# Altium PCB PCB2.TEST.PcbDoc
Units mm, origin at the board's own origin, x right, y up, seen from the top; angles counter-clockwise.
Board outline 120.4 x 83.82 mm, 2 copper layers (Top Layer, Bottom Layer); 48 components, 74 nets, 341 pads, 4 vias.
Unrouted connection lines stored in the file: 82.
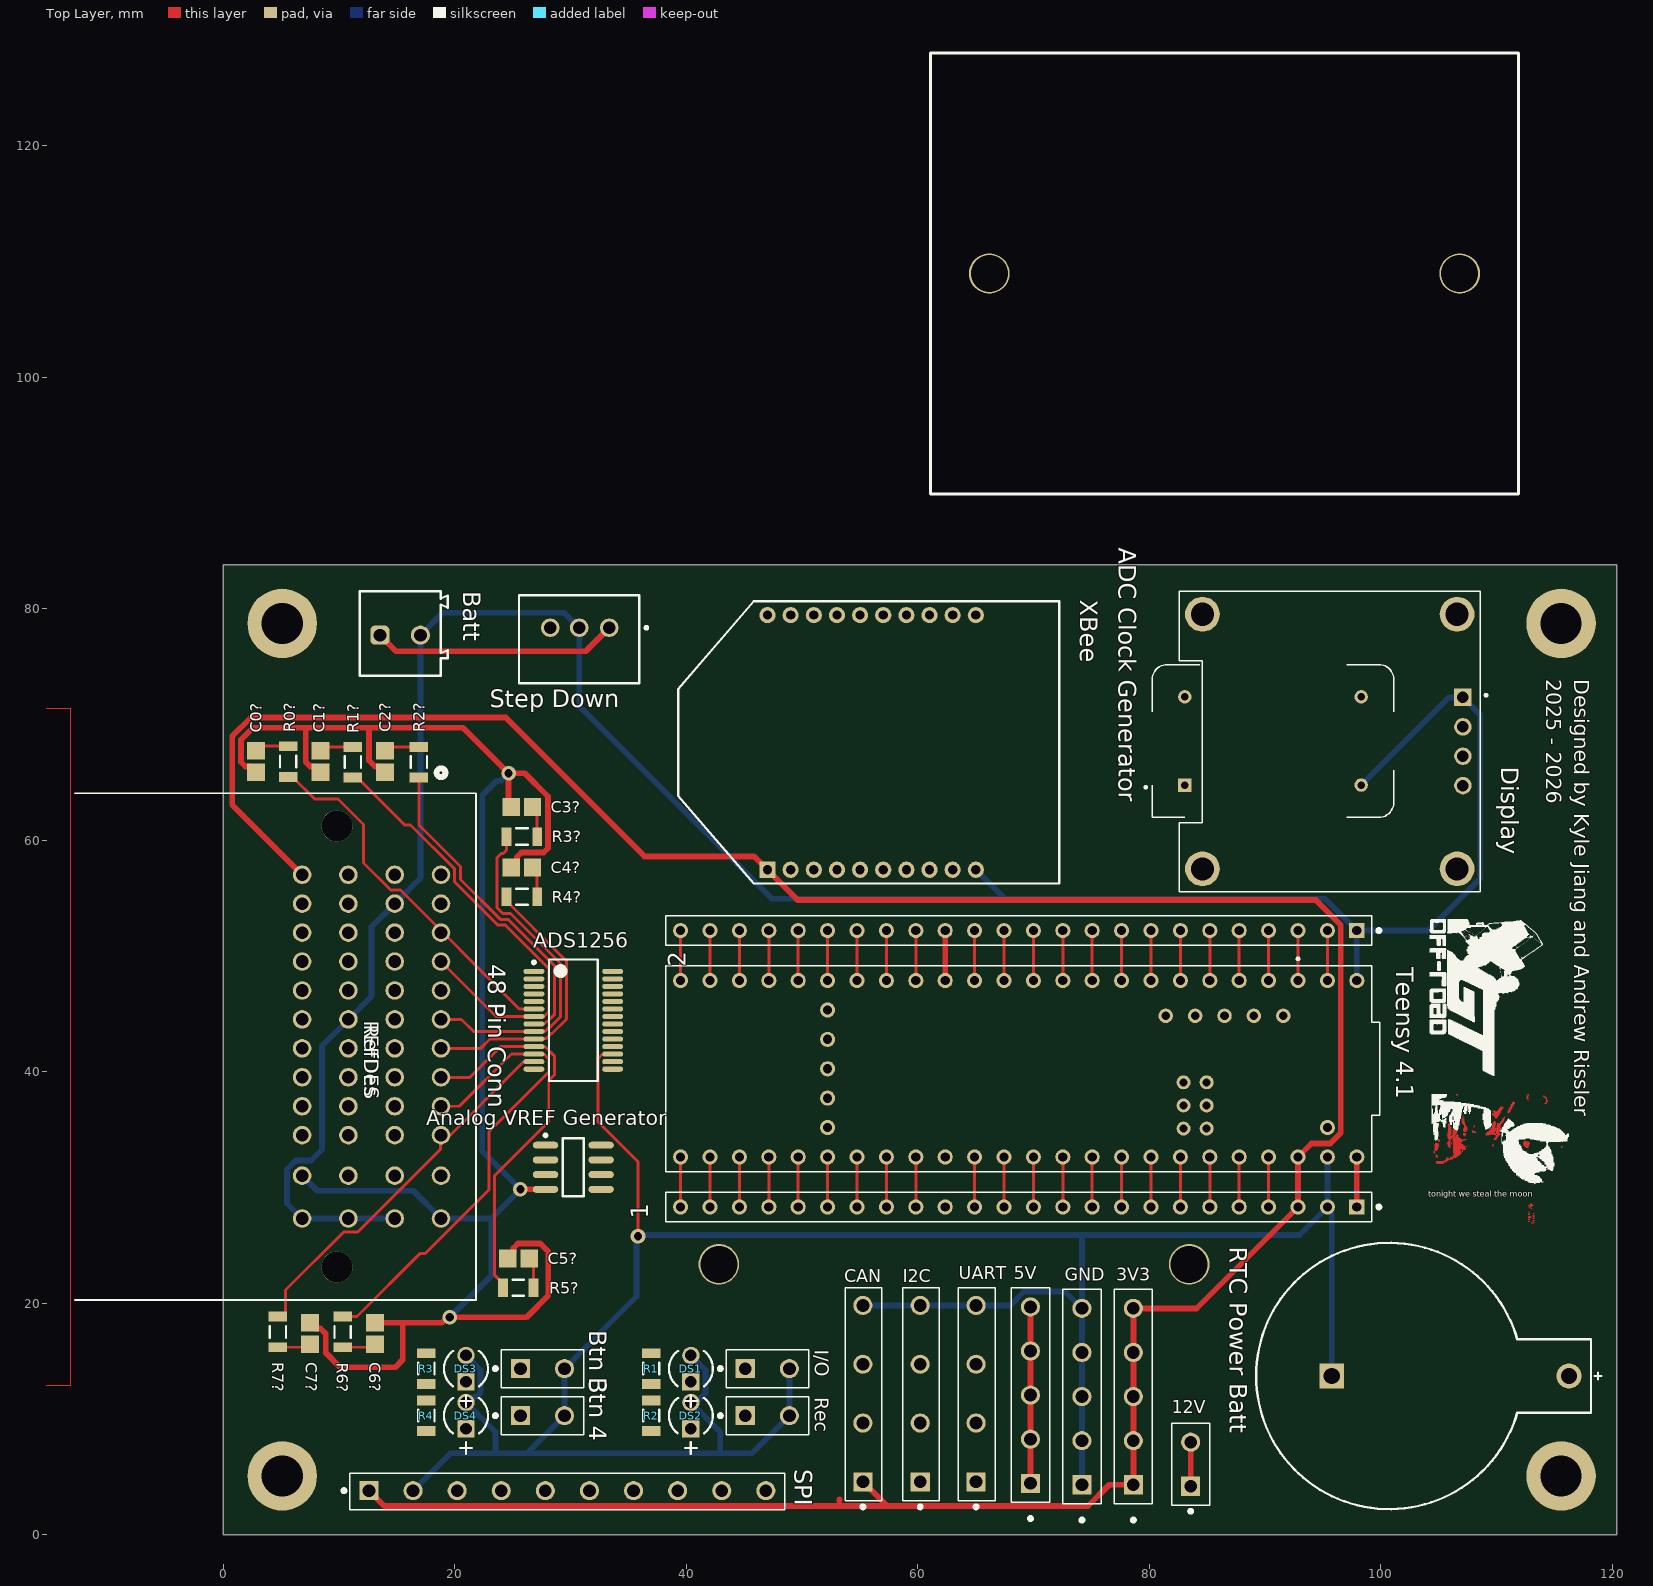
[diagram p0: Top Layer view]
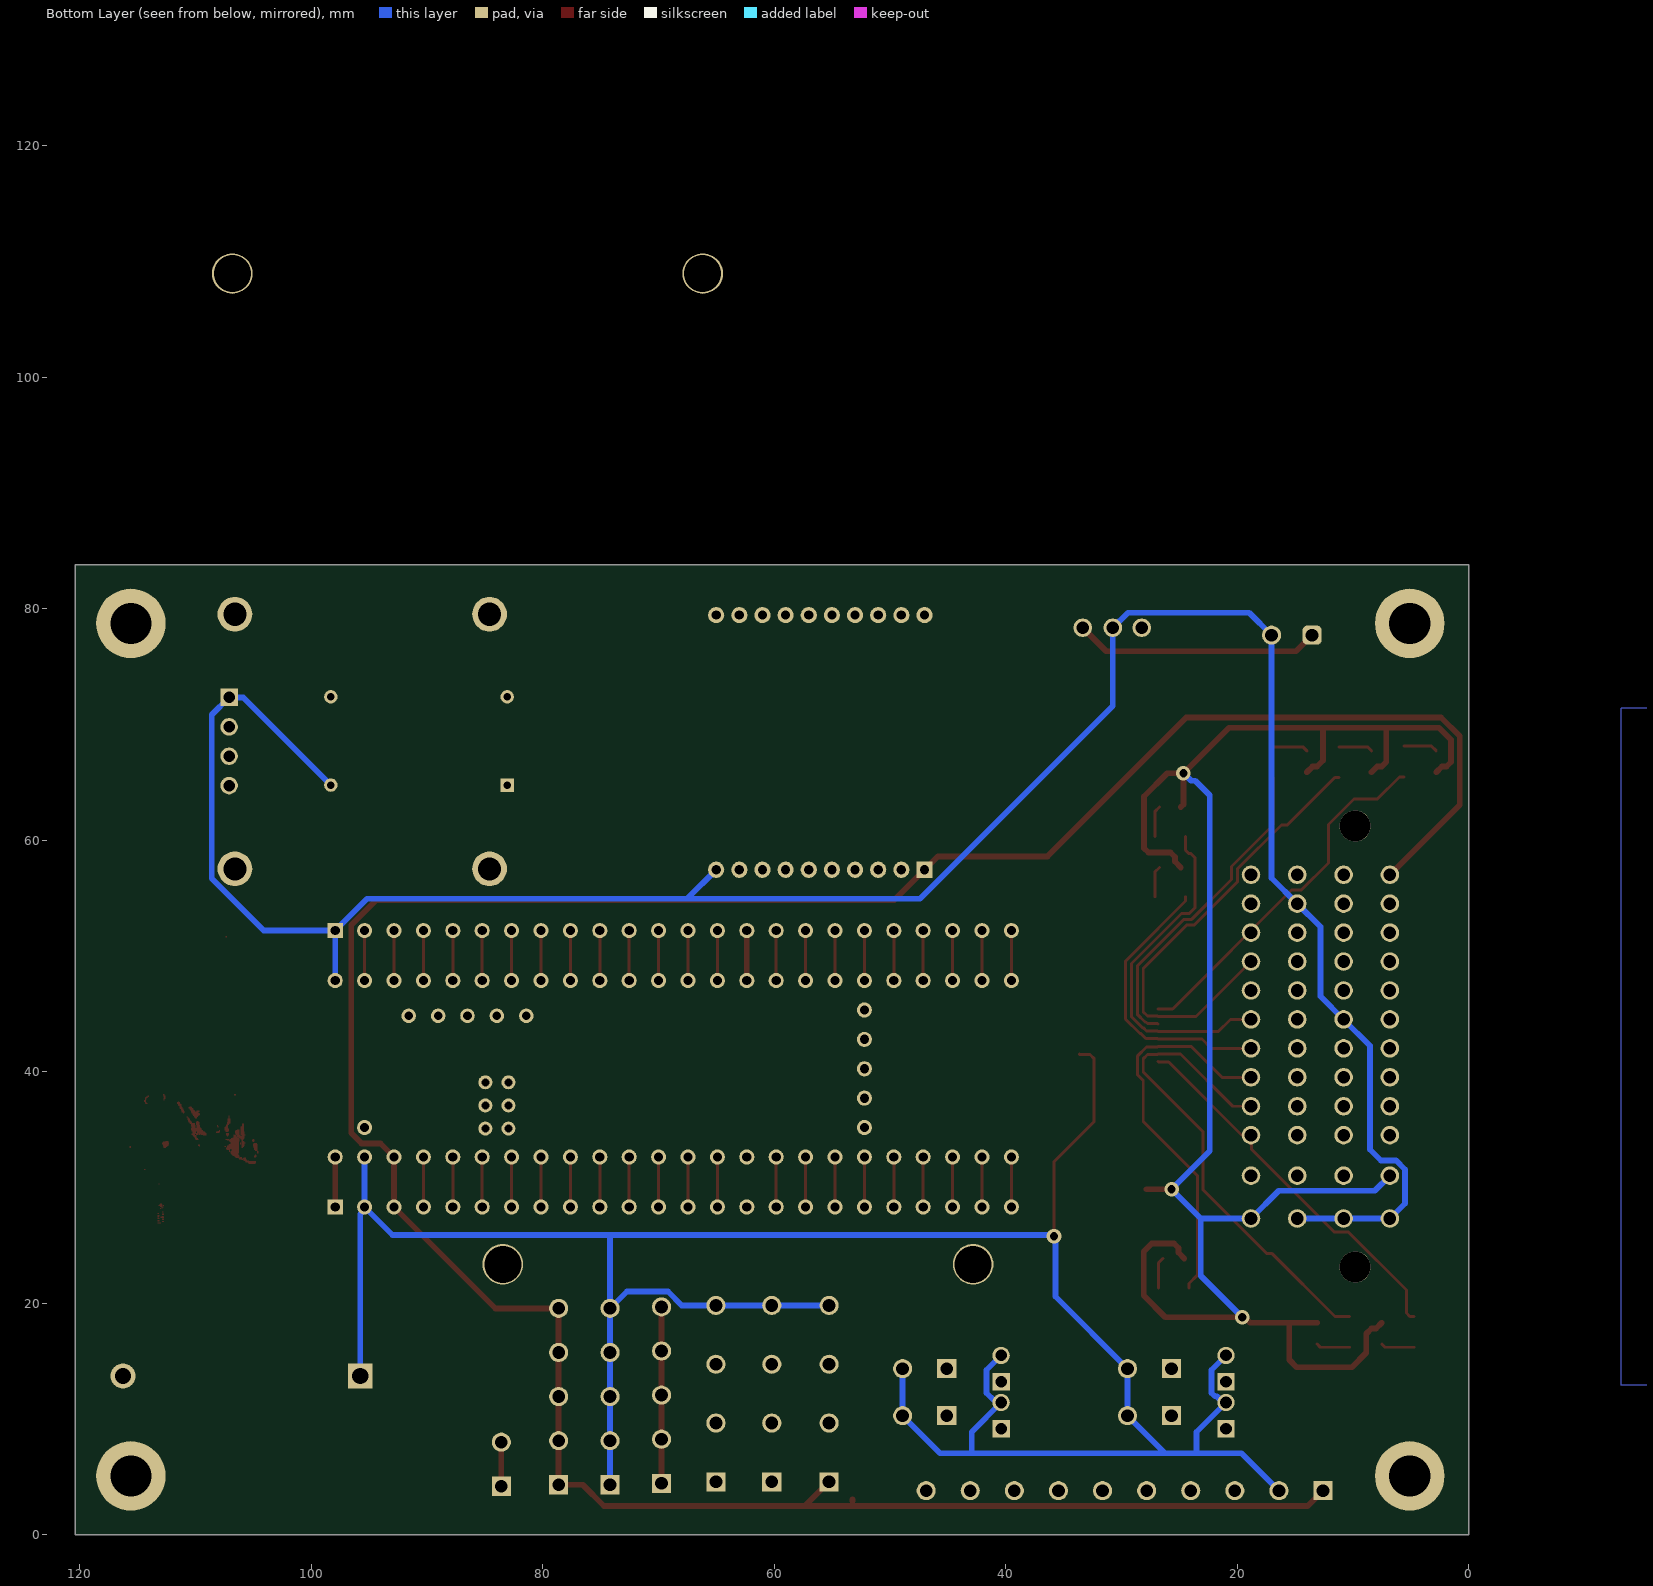
[diagram p1: Bottom Layer view, seen from below]

## Layer stack, top to bottom
Top Solder: solder mask 0.0102, Solder Resist, Dk 3.5
Top Layer: signal copper 0.0356
Dielectric 1: dielectric 0.32, FR-4, Dk 4.8
Bottom Layer: signal copper 0.0356
Bottom Solder: solder mask 0.0102, Solder Resist, Dk 3.5

## Board outline
0,0 0,83.82 120.396,83.82 120.396,0

## Design rules (kind name [scope] priority, off if disabled: settings)
Clearance [All] p1: gap=0.254 ignorepadtopadclearanceinfootprint=FALSE
ComponentClearance Ignore_48pin_Collision [InComponent('48 Pin Conn') And OnLayer('Top Layer')] p1: gap=0 collisioncheckmode=3 verticalgap=0 showdistances=FALSE donotcheckwithout3dbody=TRUE
ComponentClearance Ignore_OLED_Collision [HasFootprint('MODULE_DM-OLED096-636') vs HasFootprint('OSC_ECS-100AX-500')] p2: gap=0 collisioncheckmode=3 verticalgap=0 showdistances=FALSE donotcheckwithout3dbody=TRUE
ComponentClearance [All] p3: gap=0.254 collisioncheckmode=3 verticalgap=0.254 showdistances=FALSE
HoleSize [All] p1: absolutevalues=TRUE maxlimit=3.5 minlimit=0.025 maxpercent=80.000 minpercent=20.000
PolygonConnect [All] p1: connectstyle=Relief reliefconductorwidth=0.254 reliefentries=4 polygonreliefangle="90 Angle" airgapwidth=0.254
RoutingVias [All] p1: holewidth=0.711 width=1.27 viastyle="Through Hole" minholewidth=0.711 minwidth=1.27 maxholewidth=0.711 maxwidth=1.27
SolderMaskExpansion [All] p1: expansion=0.102 istentingtop=FALSE
SupplyNets "Schematic Supply Nets" [InNet('GND')] p1: voltage=0.000
Width [All] p1: maxlimit=0.5 minlimit=0.254 preferedwidth=0.254 minimp=50.000000 maximp=50.000000 favimp=50.000000
28 further rules are at their usual default settings.

## Classes and differential pairs
component class MainSchematic.2: 1 2 "ADC Clock Generator" ADS1256 "Analog VREF Generator" "RTC power batt" "Step Down" "Teensy 4.1" XBee
component class Filters.2: C0? C1? C2? C3? C4? C5? C6? C7? R0? R1? R2? R3? R4? R5? R6? R7?
component class 48PinConnector: 3V3 5V 12V "48 Pin Conn" Batt "Btn 3" "Btn 4" CAN Display DS1 DS2 DS3 DS4 GND I2C I/O R1 R2 R3 R4 Rec SPI UART

## Components (designator, comment, footprint, x,y, rotation, side; value= is the part's Value field where it differs from the comment)
1 "282837-4" TE_282837-4#1 97.917,28.321 r180 top
2 "282837-4" TE_282837-4#1 97.917,52.197 r180 top
3V3 "282837-4" TE_282837-4#2 78.613,4.318 r90 top
5V "282837-4" TE_282837-4#2 69.723,4.445 r90 top
12V "282837-4" TE_282837-4#3 83.566,4.191 r90 top
"48 Pin Conn" "366380003" CONN_36638-0003_MOL 18.796,57.023 r270 top (schematic designator J?)
"ADC Clock Generator" "MCO-1510A" OSC_ECS-100AX-500 90.678,68.58 r0 top
ADS1256 "ADS1256IDBTG4" TI-DB28_L 30.226,44.45 r0 top
"Analog VREF Generator" "ADR4550ARZ" ADI-R-8_N 30.226,31.75 r0 top
Batt "691214110002S" 691214110002S 15.268,77.874 r0 top
"Btn 3" "282837-4" TE_282837-4#3 25.654,14.351 r0 top
"Btn 4" "282837-4" TE_282837-4#3 25.654,10.287 r0 top
C0? "VJ0805Y682KXAMT" CAPC2013X145X48ML20T23 2.794,66.802 r90 top
C1? "VJ0805Y682KXAMT" CAPC2013X145X48ML20T23 8.382,66.802 r90 top
C2? "VJ0805Y682KXAMT" CAPC2013X145X48ML20T23 13.97,66.802 r90 top
C3? "VJ0805Y682KXAMT" CAPC2013X145X48ML20T23 25.781,62.865 r0 top
C4? "VJ0805Y682KXAMT" CAPC2013X145X48ML20T23 25.781,57.658 r0 top
C5? "VJ0805Y682KXAMT" CAPC2013X145X48ML20T23 25.491,23.876 r0 top
C6? "VJ0805Y682KXAMT" CAPC2013X145X48ML20T23 13.081,17.399 r270 top
C7? "VJ0805Y682KXAMT" CAPC2013X145X48ML20T23 7.493,17.399 r270 top
CAN "282837-4" TE_282837-4#4 55.245,4.572 r90 top
Display "DM-OLED096-636" MODULE_DM-OLED096-636 95.582,68.531 r270 top
DS1 "304090041" LED-2P-2.28-3MM_A 40.386,14.351 r90 top
DS2 "304090041" LED-2P-2.28-3MM_A 40.386,10.287 r90 top
DS3 "304090041" LED-2P-2.28-3MM_A 20.955,14.351 r90 top
DS4 "304090041" LED-2P-2.28-3MM_A 20.955,10.287 r90 top
GND "282837-4" TE_282837-4#2 74.168,4.318 r90 top
I2C "282837-4" TE_282837-4#4 60.198,4.572 r90 top
I/O "282837-4" TE_282837-4#3 45.085,14.351 r0 top
R0? "RC1206FR-10750RL" RESC3116X65X40LL10T20 5.588,66.802 r90 top
R1 "RC1206FR-10750RL" RESC3116X65X40LL10T20 36.957,14.351 r270 top
R1? "RC1206FR-10750RL" RESC3116X65X40LL10T20 11.176,66.747 r90 top
R2 "RC1206FR-10750RL" RESC3116X65X40LL10T20 36.957,10.287 r270 top
R2? "RC1206FR-10750RL" RESC3116X65X40LL10T20 16.891,66.747 r90 top
R3 "RC1206FR-10750RL" RESC3116X65X40LL10T20 17.526,14.351 r270 top
R3? "RC1206FR-10750RL" RESC3116X65X40LL10T20 25.781,60.325 r0 top
R4 "RC1206FR-10750RL" RESC3116X65X40LL10T20 17.526,10.287 r270 top
R4? "RC1206FR-10750RL" RESC3116X65X40LL10T20 25.781,55.118 r0 top
R5? "RC1206FR-10750RL" RESC3116X65X40LL10T20 25.472,21.336 r0 top
R6? "RC1206FR-10750RL" RESC3116X65X40LL10T20 10.287,17.526 r270 top
R7? "RC1206FR-10750RL" RESC3116X65X40LL10T20 4.699,17.526 r270 top
Rec "282837-4" TE_282837-4#3 45.085,10.287 r0 top
"RTC Power Batt" "101" FP-101-MFG 103.683,13.716 r0 top (schematic designator "RTC power batt")
SPI "282837-4" TE_282837-4#5 12.573,3.81 r0 top (schematic designator J?)
"Step Down" "OKI-78SR-5/1.5-W36-C" MURA-OKI-78SR-3 30.734,78.359 r180 top (schematic designator "Step Down Circuit")
"Teensy 4.1" "DEV-16771" MODULE_DEV-16771 68.707,40.259 r180 top
UART "282837-4" TE_282837-4#4 65.024,4.572 r90 top
XBee "XBP9B-DPST-001" DIP2200W51P200L3294H279Q20P 55.753,68.453 r90 top

## Footprints (in the part's own frame and the unit in brackets; to place one, negate y for a bottom-side part, rotate by r counter-clockwise, add the part's x,y. Pads: shape width x height; smd on the part's side, far side on the other; paste and mask are expansions set on the pad)
691214110002S [mm]
  rrect50% 1.65x1.65 hole 1.1: 1(-1.75,-0.15)
  round 1.65 hole 1.1: 2(1.75,-0.15)
  silkscreen extent -3.5,-3.65 4.1,3.65, body extent -3.5,-3.65 4.1,3.65, height 9.15
ADI-R-8_N [mm] "SOIC, 8-Leads, Body 4.9x3.9mm, Pitch 1.27mm, IPC Medium Density"
  oval 2.2x0.6 smd: 1(-2.4,1.905) 2(-2.4,0.635) 3(-2.4,-0.635) 4(-2.4,-1.905) 5(2.4,-1.905) 6(2.4,-0.635) 7(2.4,0.635) 8(2.4,1.905)
  silkscreen extent -2.52,-2.5 0.9,2.88, body extent -2,-2.5 2,2.5, height 1.75
CAPC2013X145X48ML20T23 [mm] "Chip Capacitor, 2-Leads, Body 2.00x1.25mm, IPC Low Density"
  rect 1.5x1.55 smd: 1(-0.925,0) 2(0.925,0)
  body extent -1.1,-0.72 1.1,0.72, height 1.45
CONN_36638-0003_MOL [mil]
  round 63 / inner round 60 / far side round 63 hole 43 paste-99999 mask+0: A1(0,0) A2(0,-157.48) A3(0,-314.96) A4(0,-472.44) B1(98.43,0) B2(98.43,-157.48) B3(98.43,-314.96) B4(98.43,-472.44) C1(196.85,0) C2(196.85,-157.48) C3(196.85,-314.96) C4(196.85,-472.44) D1(295.28,0) D2(295.28,-157.48) D3(295.28,-314.96) D4(295.28,-472.44) E1(393.7,0) E2(393.7,-157.48) E3(393.7,-314.96) E4(393.7,-472.44) F1(492.13,0) F2(492.13,-157.48) F3(492.13,-314.96) F4(492.13,-472.44) G1(590.55,0) G2(590.55,-157.48) G3(590.55,-314.96) G4(590.55,-472.44) H1(688.98,0) H2(688.98,-157.48) H3(688.98,-314.96) H4(688.98,-472.44) J1(787.4,0) J2(787.4,-157.48) J3(787.4,-314.96) J4(787.4,-472.44) K1(885.83,0) K2(885.83,-157.48) K3(885.83,-314.96) K4(885.83,-472.44) L1(1023.62,0) L2(1023.62,-157.48) L3(1023.62,-314.96) L4(1023.62,-472.44) M1(1169.29,0) M2(1169.29,-157.48) M3(1169.29,-314.96) M4(1169.29,-472.44)
  round 106 / inner round 60 / far side round 106 hole 106 unplated paste-99999 mask+0: MOUNT1(-165.35,-354.33) MOUNT2(1334.65,-354.33)
  Multi-Layer lines w1: 1441.15,-2098.83 1441.15,-1377.9 1736.15,-1377.9 1736.15,-1259.9 -566.85,-1259.9 -566.85,-1377.9 -271.85,-1377.9 -271.85,-2098.83 1441.15,-2098.83
  silkscreen extent -362,-1245 1446,119
DIP2200W51P200L3294H279Q20P [mm]
  rect 1.4x1.4 / inner round 1.4 / far side rect 1.4x1.4 hole 0.8 mask+0.102: 1(-11,8.75)
  round 1.4 hole 0.8 mask+0.102: 2(-11,6.75) 3(-11,4.75) 4(-11,2.75) 5(-11,0.75) 6(-11,-1.25) 7(-11,-3.25) 8(-11,-5.25) 9(-11,-7.25) 10(-11,-9.25) 11(11,-9.25) 12(11,-7.25) 13(11,-5.25) 14(11,-3.25) 15(11,-1.25) 16(11,0.75) 17(11,2.75) 18(11,4.75) 19(11,6.75) 20(11,8.75)
  silkscreen extent -12.19,-16.47 12.19,16.47, body extent -12.19,-16.47 12.19,29.17, height 7.67
FP-101-MFG [mm]
  rect 2.145x2.145 hole 1.395 paste-2539.97 mask+0: 1(-7.925,0)
  round 2.145 hole 1.395 paste-2539.97 mask+0: 2(12.565,0)
  silkscreen extent -14.46,-11.5 15.37,11.5, body extent -14.57,-11.61 14.57,11.61, height 0.25
LED-2P-2.28-3MM_A [mm] "LED, 2-Leads, Dia 3mm, Pitch 2.28mm"
  rect 1.5x1.5 hole 1: 1(-1.14,0)
  round 1.5 hole 1: 2(1.14,0)
  silkscreen extent -3.29,-1.9 1.52,1.9, body extent -1.9,-1.91 1.52,1.91, height 5.3
MODULE_DEV-16771 [mm]
  round 1.308 hole 0.8: 0(-26.67,-7.62) 1(-24.13,-7.62) 2(-21.59,-7.62) 3(-19.05,-7.62) 3.3V_1(6.35,-7.62) 3.3V_2(-24.13,7.62) 3.3V_3(16.51,-2.54) 4(-16.51,-7.62) 5(-13.97,-7.62) 6(-11.43,-7.62) 7(-8.89,-7.62) 8(-6.35,-7.62) 9(-3.81,-7.62) 10(-1.27,-7.62) 11(1.27,-7.62) 12(3.81,-7.62) 13(3.81,7.62) 14(1.27,7.62) 15(-1.27,7.62) 16(-3.81,7.62) 17(-6.35,7.62) 18(-8.89,7.62) 19(-11.43,7.62) 20(-13.97,7.62) 21(-16.51,7.62) 22(-19.05,7.62) 23(-21.59,7.62) 24(8.89,-7.62) 25(11.43,-7.62) 26(13.97,-7.62) 27(16.51,-7.62) 28(19.05,-7.62) 29(21.59,-7.62) 30(24.13,-7.62) 31(26.67,-7.62) 32(29.21,-7.62) 33(29.21,7.62) 34(26.67,7.62) 35(24.13,7.62) 36(21.59,7.62) 37(19.05,7.62) 38(16.51,7.62) 39(13.97,7.62) 40(11.43,7.62) 41(8.89,7.62) GND1(-29.21,-7.62) GND2(6.35,7.62) GND3(-26.67,7.62) GND4(16.51,0) ON/OFF(16.51,5.08) PROGRAM(16.51,2.54) VBAT(16.51,-5.08) VIN(-29.21,7.62) VUSB(-26.67,5.08)
  round 1.258 hole 0.75: 5V(-22.86,-4.57) D+(-17.78,-4.57) D-(-20.32,-4.57) USB_GND1(-15.24,-4.57) USB_GND2(-12.7,-4.57)
  round 1.208 hole 0.7: GND5(-14.24,3.17) LED(-16.24,3.17) R+(-16.24,5.17) R-(-14.24,5.17) T+(-14.24,1.17) T-(-16.24,1.17)
  silkscreen extent -31.18,-9.6 30.48,8.89, body extent -31.18,-8.89 30.48,8.89, height 7.15
MODULE_DM-OLED096-636 [mm]
  rect 1.508x1.508 / inner round 1.508 / far side rect 1.508x1.508 hole 1: 1(-3.81,11.5)
  round 1.508 hole 1: 2(-1.27,11.5) 3(1.27,11.5) 4(3.81,11.5)
  round 3 hole 2: S1(-11,11) S2(11,11) S3(11,-11) S4(-11,-11)
  silkscreen extent -13,-13 13,13.6
MURA-OKI-78SR-3 [mm] "THMT, 3-Leads, Body 10.4x7.6mm"
  round 1.6 hole 1.1: 1(-2.6,0) 2(0,0) 3(2.5,0)
  silkscreen extent -5.92,-2.8 5.2,4.8, body extent -5.2,-2.8 5.2,4.8, height 16.5
OSC_ECS-100AX-500 [mm]
  rect 1.158x1.158 hole 0.65: 1(-7.62,-3.81)
  round 1.158 hole 0.65: 7(7.62,-3.81) 8(7.62,3.81) 14(-7.62,3.81)
  silkscreen extent -11.1,-6.6 10.43,6.6
RESC3116X65X40LL10T20 [mm] "Chip Resistor, 2-Leads, Body 3.10x1.60mm, IPC High Density"
  rect 0.85x1.6 smd: 1(-1.325,0) 2(1.325,0)
  silkscreen extent -0.5,-0.7 0.5,0.7, body extent -1.6,-0.85 1.6,0.85, height 0.65
TE_282837-4#1 [mm]
  rect 1.308x1.308 / inner round 1.308 / far side rect 1.308x1.308 hole 0.8: 1(0,0)
  round 1.308 hole 0.8: 2(2.54,0) 3(5.08,0) 4(7.62,0) 5(10.16,0) 6(12.7,0) 7(15.24,0) 8(17.78,0) 9(20.32,0) 10(22.86,0) 11(25.4,0) 12(27.94,0) 13(30.48,0) 14(33.02,0) 15(35.56,0) 16(38.1,0) 17(40.64,0) 18(43.18,0) 19(45.72,0) 20(48.26,0) 21(50.8,0) 22(53.34,0) 23(55.88,0) 24(58.42,0)
  silkscreen extent -2.05,-1.27 59.69,1.27
TE_282837-4#2 [mm]
  rect 1.65x1.65 / inner round 1.65 / far side rect 1.65x1.65 hole 1.1: 1(0,0)
  round 1.65 hole 1.1: 2(3.81,0) 3(7.62,0) 4(11.43,0) 5(15.24,0)
  silkscreen extent -3.2,-1.65 16.89,1.65
TE_282837-4#3 [mm]
  rect 1.65x1.65 / inner round 1.65 / far side rect 1.65x1.65 hole 1.1: 1(0,0)
  round 1.65 hole 1.1: 2(3.81,0)
  silkscreen extent -2.31,-1.65 5.46,1.65
TE_282837-4#4 [mm]
  rect 1.65x1.65 / inner round 1.65 / far side rect 1.65x1.65 hole 1.1: 1(0,0)
  round 1.65 hole 1.1: 2(5.08,0) 3(10.16,0) 4(15.24,0)
  silkscreen extent -2.31,-1.65 16.76,1.52, body extent -1.65,-1.65 16.76,1.52, height 0.25
TE_282837-4#5 [mm]
  rect 1.65x1.65 / inner round 1.65 / far side rect 1.65x1.65 hole 1.1: 1(0,0)
  round 1.65 hole 1.1: 2(3.81,0) 3(7.62,0) 4(11.43,0) 5(15.24,0) 6(19.05,0) 7(22.86,0) 8(26.67,0) 9(30.48,0) 10(34.29,0)
  silkscreen extent -2.31,-1.65 35.94,1.52
TI-DB28_L [mm] "SOP, 28-Leads, Body 10.2x5.3mm, Pitch 0.65mm, IPC High Density"
  oval 1.8x0.45 smd: 1(-3.4,4.225) 2(-3.4,3.575) 3(-3.4,2.925) 4(-3.4,2.275) 5(-3.4,1.625) 6(-3.4,0.975) 7(-3.4,0.325) 8(-3.4,-0.325) 9(-3.4,-0.975) 10(-3.4,-1.625) 11(-3.4,-2.275) 12(-3.4,-2.925) 13(-3.4,-3.575) 14(-3.4,-4.225) 15(3.4,-4.225) 16(3.4,-3.575) 17(3.4,-2.925) 18(3.4,-2.275) 19(3.4,-1.625) 20(3.4,-0.975) 21(3.4,-0.325) 22(3.4,0.325) 23(3.4,0.975) 24(3.4,1.625) 25(3.4,2.275) 26(3.4,2.925) 27(3.4,3.575) 28(3.4,4.225)
  silkscreen extent -3.52,-5.25 2.1,5.25, body extent -2.8,-5.25 2.8,5.25, height 2

## Part data
1 2 3V3 5V 12V "Btn 3" "Btn 4" CAN GND I2C I/O Rec SPI UART: "4 Position Wire to Board Terminal Block Horizontal with Board 0.200 (5.08mm) Through Hole", Package=None, Availability="In Stock", Check_prices=https://www.snapeda.com/parts/282837-4/TE+Connectivity+AMP+Connectors/view-part/?ref=eda, EU_RoHS_Compliance="Compliant with Exemptions", MF="TE Connectivity", MP=282837-4, Price=None, Purchase-URL=https://pricing.snapeda.com/search/part/282837-4/?ref=eda, SnapEDA_Link=https://www.snapeda.com/parts/282837-4/TE+Connectivity+AMP+Connectors/view-part/?ref=snap
"48 Pin Conn": "2.50mm, 3.50mm CMC Header, Right-Angle, 48 Position, 1 Port, Brown, Peg,  Lead-Free", Manufacturer_Name="Molex Connector Corporation", Copyright="Copyright (C) 2025 Ultra Librarian. All rights reserved.", Manufacturer_Part_Number=366380003, RefDes=RefDes, Type=Type
"ADC Clock Generator": library part ECS-100AX-500, "Oscillator  14-DIP, 4 Leads (Full Size, Metal Can)", Package=None, Availability=Unavailable, MP=ECS-100AX-500, Price=None
ADS1256: library part CMP-0003-00153-1, "24-Bit, 30 kSPS Very Low Noise Delta-Sigma ADC with Multiplexer, -40 to 85 degC, 28-pin SOP (DB28), Green (RoHS & no Sb/Br)", Analog Voltage AV/DD(Max)(V)=5.25, Analog Voltage AV/DD(Min)(V)=4.75, Manufacturer="Texas Instruments", # Input Channels=8, Architecture=Delta-Sigma, Code_JEDEC=MO-150, ComponentLink1Description="Manufacturer URL", ComponentLink1URL=http://www.ti.com/, ComponentLink2Description=Datasheet, ComponentLink2URL=http://www.ti.com/general/docs/lit/getliterature.tsp?genericPartNumber=ADS1256&fileType=pdf, ComponentLink3Description="Package Specification", ComponentLink3URL=http://www.ti.com/lit/ml/msso002e/msso002e.pdf, DatasheetVersion=SBAS288J, Digital Supply(Max)(V)=3.6, Digital Supply(Min)(V)=1.8, Eco-Plan="Green (RoHS & no Sb/Br)", Interface="Serial SPI", Mounting Technology="Surface Mount", PackageDescription="28-Pin Plastic Small Outline, Body 10.2 X 5.3 mm, Pitch 0.65 mm", PackageReference=DB28, PackageVersion="4040065/E, 12/2001", PartNumber=ADS1256IDBTG4, Resolution(Bits)=24, Sample Rate (max)(SPS)=30k, SubFamily="Precision ADC (<=10MSPS)"
"Analog VREF Generator": library part CMP-0784-00194-1, "Ultralow Noise, High Accuracy Voltage Reference, 5 V Output, 3 to 15 V Supply, Industrial, 8-pin SOIC (R-8), Tube", Manufacturer="Analog Devices", Operating Temp Range="-40 to 125 degC", Code_JEDEC=MS-012-AA, ComponentLink1Description="Manufacturer URL", ComponentLink1URL=http://www.analog.com/en/index.html, ComponentLink2Description=Datasheet, ComponentLink2URL=http://www.analog.com/static/imported-files/data_sheets/ADR4520_4525_4530_4533_4540_4550.pdf, ComponentLink3Description="Package Specification", ComponentLink3URL=http://www.analog.com/static/imported-files/packages/PKG_PDF/SOIC_Narrow%20(R)/R_8.pdf, ComponentLink4Description="URL Link1", ComponentLink4URL="Product URL:http://www.analog.com/en/special-linear-functions/voltage-references/adr4550/products/product.html", DatasheetVersion="Rev. 0", Max V Supply (V)=15, Min V Supply (V)=3, Mounting Technology="Surface Mount", PackageDescription="8-Pin Standard Small Outline Package, Body 4.9 x 3.9 mm, Pitch 1.27 mm", PackageReference=R-8, PackageVersion="060506-A, 06/2006", Packing=Tube, PartNumber=ADR4550ARZ, Ref Out TC (ppm/C)=4, Vout=5V
Batt: library part CMP-1502-02465-2, Current Rating=10A, Max Operating Temperature=120°C, Min Operating Temperature=-30°C, Voltage Rating=300V, Contact Material="Nickel, Tin", Height=9.2mm, Lead Pitch=3.5mm, NexarPartId=94172715, Number of Contacts=2, Number of Pins=2, Number of Rows=1, Packaging=Box
C0? C1? C2? C3? C4? C5? C6? C7?: library part CMP-2007-03205-1, Manufacturer=Vitramon, Part Number=VJ0805Y682KXAMT
Display: "0.96â€ 128 X 64 MONOCHROME GRAPHIC OLED DISPLAY MODULE - I2C", Package=Package, Check_prices=https://www.snapeda.com/parts/DM-OLED096-636/Display+Module/view-part/?ref=eda, MF="Display Module", MP=DM-OLED096-636, SnapEDA_Link=https://www.snapeda.com/parts/DM-OLED096-636/Display+Module/view-part/?ref=snap
DS1 DS2 DS3 DS4: library part CMP-007-00007-2, "Red LED, 80 mW, 30 mA, -25 to 85 degC, 2-Pin THD", Manufacturer="Shenzhen CGX", Package Description="2-Pin Through Hole Device, Dia 3 mm, Pitch 2.28 mm", Case/Package=304090041, Datasheet URL=http://datasheet.octopart.com/304090041-Chengguangxing-datasheet-62330656.pdf, Datasheet Version=Sep-14, Manufacturer URL=http://szcgx.com/, Mounting Technology=TH, Package Reference=304090041, RoHS Compliant=Unknown
R0? R1 R1? R2 R2? R3 R3? R4 R4? R5? R6? R7?: library part CMP-2003-04964-1, Manufacturer=Yageo, Part Number=RC1206FR-10750RL
"RTC Power Batt": library part CMP-19636-000018-1, "BATTERY HOLDER COIN 20MM PC PIN", Max Operating Temperature=145°C, Min Operating Temperature=-50°C, Package Quantity=1, Body Material=PBT, Contact Plating=Tin, Lead Free="Lead Free", Material=Steel, Mount="Through Hole", Number of Batteries=1, Number of Cells=1, Packaging=Bag, REACH SVHC="No SVHC", series=-, Termination="PC Pin"
"Step Down": library part CMP-2000-05274-1, "Non-Isolated DC/DC Converter, 7.5 W, 7 to 36 V, 1.5 A, -40 to 85 degC, 3-Pin THD, RoHS", Current - Output (Max)=1.5A, Manufacturer=Murata, Operating Temperature=-40degC~85degC, Package / Case=3-SIPModule, Power (Watts) - Manufacture Series=8W, Voltage - Input (Max)=36V, Voltage - Input (Min)=7V, Voltage - Isolation=-, Voltage - Output 1=5V, Applications=ITE(Commercial), Category=PowerSupplies-BoardMount, Datasheet URL=https://datasheet.ciiva.com/8006/1790439-8006672.pdf, Datasheet Version=Oct-13, Efficiency=90.5%, Family=DCDCConverters, Features=SCP, Manufacturer URL=http://www.murata.com/, Mounting Type=ThroughHole, Number of Outputs=1, Packaging=Tube, Power (Watts) - Max=8W, series=Okami™OKI-78SR, Size / Dimension="0.41\"Lx0.30\"Wx0.65\"H(10.4mmx7.6mmx16.5mm)", Type=LinearRegulatorReplacement, Voltage - Output 2=-, Voltage - Output 3=-
"Teensy 4.1": library part CMP-003-000000-1, "RT1062 Teensy 4.1 series ARM?Cortex?M7 MPU Embedded Evaluation Board", Package=None, Check_prices=https://www.snapeda.com/parts/DEV-16771/SparkFun+Electronics/view-part/?ref=eda, MF="SparkFun Electronics", MP=DEV-16771, SnapEDA_Link=https://www.snapeda.com/parts/DEV-16771/SparkFun+Electronics/view-part/?ref=snap
XBee: "General ISM < 1GHz - Transceiver Module 900MHz Antenna Not Included, RP-SMA Through Hole", Package="Module Digi International", Check_prices=https://www.snapeda.com/parts/XBP9B-DPST-001/Digi+International/view-part/?ref=eda, MF="Digi International", MP=XBP9B-DPST-001, SnapEDA_Link=https://www.snapeda.com/parts/XBP9B-DPST-001/Digi+International/view-part/?ref=snap

## Free pads (board coordinates)
  round 6 hole 3.55: 6(5.08,78.74) 7(5.08,5.08) 8(115.57,78.74) 9(115.57,5.08)
  round 3.5 hole 3.2: 10(66.167,108.966) 11(106.807,108.966) 13(42.799,23.368) 14(83.439,23.368)

## Via types
v1: diameter 1.27, hole 0.711, Top Layer to Bottom Layer, 4 vias

## Nets (pads, with @x,y where several pads share a name; then routed paths per layer and width w, separated by ;. In a path a pad name is that pad's centre, name@x,y a point inside that pad or via, vN(x,y) a via of type N, cw(c..) or ccw(c..) an arc to the next point about the centre after c; other vN are vias at no path point)
GND: 1.2 1.15 2.1 "48 Pin Conn.B2" "48 Pin Conn.F3" "48 Pin Conn.M2" "48 Pin Conn.M3" "48 Pin Conn.M4" "ADC Clock Generator.7" "Btn 3.2" "Btn 4.2" "RTC Power Batt.1" "Step Down.2" "Teensy 4.1.GND1" "Teensy 4.1.GND2" "Teensy 4.1.GND3" ADS1256.3 ADS1256.17 Batt.2 CAN.4 Display.1 DS1.2 DS2.2 DS3.2 DS4.2 GND.1 GND.2 GND.3 GND.4 GND.5 I2C.4 I/O.2 Rec.2 SPI.2 UART.4 XBee.10 | length 433.2
  Top Layer w0.254: ADS1256.17 33.588,41.487 32.706,41.487 32.345,41.126 32.345,35.699 35.814,32.23 v1(35.814,25.781)
  Bottom Layer w0.5: 14.796,27.323 10.796,27.323 6.796,27.323 5.492,28.627 5.492,31.563 6.256,32.327 7.562,32.327 8.515,33.28 8.515,42.242 10.796,44.523 12.796,46.523 12.796,52.523 14.796,54.523 17.018,56.745 Batt.2 18.957,79.663 29.43,79.663 30.734,78.359 30.734,71.609 47.402,54.941 67.515,54.941 ; SPI.2 19.622,7.049 23.495,7.049 ; DS3.2 22.209,14.237 22.209,12.252 21.914,11.957 21.756,11.957 21.226,11.427 DS4.2 23.495,8.887 23.495,7.049 ; v1@35.687,25.908 74.168,25.908 ; v1(35.814,25.781) 35.687,25.654 35.687,20.574 29.464,14.351 29.464,10.287 26.226,7.049 ; DS1.2 41.64,14.237 41.64,12.252 41.006,11.618 40.577,11.618 DS2.2 42.926,8.887 42.926,7.049 ; I/O.2 Rec.2 45.657,7.049 42.926,7.049 ; CAN.4 I2C.4 UART.4 67.971,19.812 69.173,21.014 72.712,21.014 GND.5 ; XBee.10 67.515,54.941 ; GND.1 GND.2 GND.3 GND.4 GND.5 ; 95.377,32.639 1.2 ; 95.758,13.716 95.758,27.721 95.377,28.102 1.2 ; 97.917,47.879 2.1 ; 98.298,64.77 105.869,72.341 Display.1 108.586,70.837 108.586,56.701 104.082,52.197 2.1 ; 23.495,7.049 26.226,7.049 ; 26.226,7.049 42.926,7.049 ; 67.515,54.941 95.173,54.941 2.1 ; GND.5 74.168,25.908 ; 74.168,25.908 92.964,25.908 1.2
Net1_1: 1.1 5V.1 5V.2 5V.3 5V.4 5V.5 "48 Pin Conn.A2" "48 Pin Conn.E3" "48 Pin Conn.L2" "Step Down.3" "Teensy 4.1.VIN" ADS1256.1 Display.2 I2C.1 SPI.3 UART.1 | length 19.6
  Top Layer w0.5: 5V.1 5V.5 ; 1.1 97.917,32.639
Net1_3: 1.3 2.15 3V3.1 3V3.2 3V3.3 3V3.4 3V3.5 "48 Pin Conn.A4" "ADC Clock Generator.14" "Teensy 4.1.3.3V_1" "Teensy 4.1.3.3V_2" ADS1256.16 CAN.1 SPI.1 XBee.1 | length 253
  Top Layer w0.5: 6.796,57.023 0.761,63.058 0.761,68.998 2.375,70.612 24.383,70.612 36.385,58.61 45.846,58.61 XBee.1 49.616,54.84 94.372,54.84 96.535,52.677 96.535,34.699 95.633,33.797 93.995,33.797 92.837,32.639 1.3 84.074,19.558 3V3.5 3V3.4 3V3.3 3V3.2 3V3.1 76.531,4.318 74.694,2.481 57.277,2.481 ; SPI.1 13.902,2.481 57.277,2.481 ; 53.213,2.921 53.213,3.048 ; CAN.1 57.277,2.54 57.277,2.481 ; 62.357,47.879 2.15
Net1_4: 1.4 "Teensy 4.1.23" ADS1256.15 | length 4.3
  Top Layer w0.254: 1.4 90.297,32.639
Net1_5: 1.5 "Teensy 4.1.22" ADS1256.21 | length 4.3
  Top Layer w0.254: 1.5 87.757,32.639
Net1_6: 1.6 "48 Pin Conn.K2" "Teensy 4.1.21" | length 4.3
  Top Layer w0.254: 1.6 85.217,32.639
Net1_7: 1.7 "48 Pin Conn.J2" "Teensy 4.1.20" | length 4.3
  Top Layer w0.254: 1.7 82.677,32.639
Net1_8: 1.8 "48 Pin Conn.H3" "Teensy 4.1.19" Display.3 I2C.3 | length 4.3
  Top Layer w0.254: 1.8 80.137,32.639
Net1_9: 1.9 "48 Pin Conn.G3" "Teensy 4.1.18" Display.4 I2C.2 | length 4.3
  Top Layer w0.254: 1.9 77.597,32.639
Net1_10: 1.10 "48 Pin Conn.F2" "Teensy 4.1.17" | length 4.3
  Top Layer w0.254: 1.10 75.057,32.639
Net1_11: 1.11 "48 Pin Conn.E2" "Teensy 4.1.16" | length 4.3
  Top Layer w0.254: 1.11 72.517,32.639
Net1_12: 1.12 "48 Pin Conn.D2" "Teensy 4.1.15" | length 4.3
  Top Layer w0.254: 1.12 69.977,32.639
Net1_13: 1.13 "48 Pin Conn.C2" "Teensy 4.1.14" | length 4.3
  Top Layer w0.254: 1.13 67.437,32.639
Net1_14: 1.14 "Teensy 4.1.13" ADS1256.24 | length 4.3
  Top Layer w0.254: 1.14 64.897,32.639
Net1_16: 1.16 "48 Pin Conn.H2" "Teensy 4.1.41" | length 4.3
  Top Layer w0.254: 1.16 59.817,32.639
Net1_17: 1.17 "Teensy 4.1.40" R1.1 | length 4.3
  Top Layer w0.254: 1.17 57.277,32.639
Net1_18: 1.18 "Teensy 4.1.39" | length 4.3
  Top Layer w0.254: 1.18 54.737,32.639
Net1_19: 1.19 "Teensy 4.1.38" | length 4.3
  Top Layer w0.254: 1.19 52.197,32.639
Net1_20: 1.20 "48 Pin Conn.G4" "Teensy 4.1.37" SPI.9 | length 4.3
  Top Layer w0.254: 1.20 49.657,32.639
Net1_21: 1.21 "48 Pin Conn.F4" "Teensy 4.1.36" SPI.8 | length 4.3
  Top Layer w0.254: 1.21 47.117,32.639
Net1_22: 1.22 "Teensy 4.1.35" R2.1 | length 4.3
  Top Layer w0.254: 1.22 44.577,32.639
Net1_23: 1.23 "Teensy 4.1.34" Rec.1 | length 4.3
  Top Layer w0.254: 1.23 42.037,32.639
Net1_24: 1.24 "48 Pin Conn.H4" "Teensy 4.1.33" SPI.10 | length 4.3
  Top Layer w0.254: 1.24 39.497,32.639
Net2_2: 2.2 "48 Pin Conn.E4" "Teensy 4.1.0" SPI.7 | length 4.3
  Top Layer w0.254: 95.377,47.879 2.2
Net2_3: 2.3 "48 Pin Conn.C4" "Teensy 4.1.1" SPI.5 | length 4.3
  Top Layer w0.254: 92.837,47.879 2.3
Net2_4: 2.4 "Teensy 4.1.2" | length 4.3
  Top Layer w0.254: 90.297,47.879 2.4
Net2_5: 2.5 "Teensy 4.1.3" | length 4.3
  Top Layer w0.254: 87.757,47.879 2.5
Net2_6: 2.6 "Teensy 4.1.4" | length 4.3
  Top Layer w0.254: 85.217,47.879 2.6
Net2_7: 2.7 "Teensy 4.1.5" | length 4.3
  Top Layer w0.254: 82.677,47.879 2.7
Net2_8: 2.8 "Teensy 4.1.6" | length 4.3
  Top Layer w0.254: 80.137,47.879 2.8
Net2_9: 2.9 "48 Pin Conn.C3" "Teensy 4.1.7" UART.2 XBee.2 | length 4.3
  Top Layer w0.254: 77.597,47.879 2.9
Net2_10: 2.10 "48 Pin Conn.D3" "Teensy 4.1.8" UART.3 XBee.3 | length 4.3
  Top Layer w0.254: 75.057,47.879 2.10
Net2_11: 2.11 "Teensy 4.1.9" | length 4.3
  Top Layer w0.254: 72.517,47.879 2.11
Net2_12: 2.12 "Teensy 4.1.10" ADS1256.20 | length 4.3
  Top Layer w0.254: 69.977,47.879 2.12
Net2_13: 2.13 "Teensy 4.1.11" ADS1256.23 | length 4.3
  Top Layer w0.254: 67.437,47.879 2.13
Net2_14: 2.14 "Teensy 4.1.12" ADS1256.22 | length 4.3
  Top Layer w0.254: 64.897,47.879 2.14
Net2_16: 2.16 "Teensy 4.1.24" ADS1256.14 | length 4.3
  Top Layer w0.254: 59.817,47.879 2.16
Net2_17: 2.17 "48 Pin Conn.G2" "Teensy 4.1.25" | length 4.3
  Top Layer w0.254: 57.277,47.879 2.17
Net2_18: 2.18 "48 Pin Conn.D4" "Teensy 4.1.26" SPI.6 | length 4.3
  Top Layer w0.254: 54.737,47.879 2.18
Net2_19: 2.19 "48 Pin Conn.B4" "Teensy 4.1.27" SPI.4 | length 4.3
  Top Layer w0.254: 52.197,47.879 2.19
Net2_20: 2.20 "Btn 3.1" "Teensy 4.1.28" | length 4.3
  Top Layer w0.254: 49.657,47.879 2.20
Net2_21: 2.21 "Teensy 4.1.29" R3.1 | length 4.3
  Top Layer w0.254: 47.117,47.879 2.21
Net2_24: 2.24 "Teensy 4.1.32" | length 4.3
  Top Layer w0.254: 39.497,47.879 2.24
Net12V_1: 12V.1 12V.2 "48 Pin Conn.L3" "Analog VREF Generator.2" "Step Down.1" Batt.1 | length 25
  Top Layer w0.5: Batt.1 14.915,76.327 31.302,76.327 33.334,78.359 ; 12V.1 12V.2
"Net48 Pin Conn_A1": "48 Pin Conn.A1" "48 Pin Conn.L1" "Analog VREF Generator.6" ADS1256.4
"Net48 Pin Conn_A3": 2.22 "48 Pin Conn.A3" "Teensy 4.1.30" CAN.2 | length 4.3
  Top Layer w0.254: 44.577,47.879 2.22
"Net48 Pin Conn_B1": "48 Pin Conn.B1" "48 Pin Conn.L4" "48 Pin Conn.M1" "Analog VREF Generator.4" ADS1256.2 ADS1256.5 C0?.1 C1?.1 C2?.1 C3?.1 C4?.1 C5?.1 C6?.1 C7?.1 | length 164.2
  Top Layer w0.5: C0?.1 2.294,66.377 1.906,66.377 1.515,66.768 1.515,68.686 2.552,69.723 7.112,69.723 ; C7?.1 7.993,17.824 8.381,17.824 8.829,17.375 8.829,15.721 10.072,14.478 14.859,14.478 15.494,15.113 15.494,18.324 ; C1?.1 7.882,66.377 7.494,66.377 7.103,66.768 7.103,69.714 7.112,69.723 ; C6?.1 15.494,18.324 ; C2?.1 13.47,66.377 13.082,66.377 12.573,66.886 12.573,69.723 ; C5?.1 25.066,24.376 25.066,24.764 25.457,25.155 27.375,25.155 28.067,24.463 28.067,20.668 26.195,18.796 v1(19.558,18.796) 19.35,18.796 18.878,18.324 15.494,18.324 ; C4?.1 25.356,58.158 25.356,58.546 25.747,58.937 27.656,58.937 28.035,59.316 28.035,63.774 26.023,65.786 v1(24.638,65.786) ; C3?.1 24.638,63.083 v1(24.638,65.786) ; v1(25.654,29.845) 27.826,29.845 ; 7.112,69.723 12.573,69.723 ; 12.573,69.723 20.701,69.723 v1(24.638,65.786)
  Bottom Layer w0.5: 6.796,31.023 8.1,29.719 16.4,29.719 18.796,27.323 23.132,27.323 ; v1(19.558,18.796) 23.132,22.37 23.132,27.323 ; v1(24.638,65.786) 24.595,65.786 23.96,65.151 23.622,65.151 22.352,63.881 22.352,33.147 v1(25.654,29.845) 23.132,27.323
"Net48 Pin Conn_B3": 2.23 "48 Pin Conn.B3" "Teensy 4.1.31" CAN.3 | length 4.3
  Top Layer w0.254: 42.037,47.879 2.23
"Net48 Pin Conn_C1": "48 Pin Conn.C1" ADS1256.6 R0?.1 | length 31.5
  Top Layer w0.254: R0?.1 5.963,65.477 7.881,63.559 9.903,63.559 12.105,61.357 12.105,58.044 14.445,55.704 15.285,55.704 25.564,45.425 ADS1256.6
"Net48 Pin Conn_D1": "48 Pin Conn.D1" ADS1256.7 R1?.1 | length 39.6
  Top Layer w0.254: R1?.1 11.551,65.422 15.655,61.318 16.171,61.318 19.977,57.512 19.977,56.396 23.712,52.661 24.372,52.661 28.107,48.926 28.107,45.174 27.746,44.813 26.864,44.813 ADS1256.7 23.544,44.775 18.796,49.523
"Net48 Pin Conn_E1": "48 Pin Conn.E1" ADS1256.8 R2?.1 | length 27.8
  Top Layer w0.254: R2?.1 16.891,61.317 20.485,57.723 20.485,56.607 23.923,53.169 24.582,53.169 28.615,49.136 28.615,44.964 27.962,44.311 27.894,44.311 27.745,44.162 26.864,44.162 ADS1256.8
"Net48 Pin Conn_F1": "48 Pin Conn.F1" ADS1256.9 R3?.1 | length 30
  Top Layer w0.254: 18.796,44.523 20.578,44.523 21.626,43.475 ADS1256.9 26.864,43.512 27.814,43.512 28.104,43.803 28.173,43.803 29.123,44.753 29.123,49.347 24.793,53.677 24.133,53.677 23.65,54.16 23.65,58.516 24.002,58.867 24.179,58.867 24.456,59.144 R3?.1
"Net48 Pin Conn_G1": "48 Pin Conn.G1" ADS1256.10 R4?.1 | length 24.6
  Top Layer w0.254: 18.796,42.023 22.228,42.023 23.03,42.825 ADS1256.10 26.864,42.863 27.882,42.863 28.315,43.295 28.383,43.295 29.631,44.543 29.631,49.557 29.123,50.065 29.123,50.076 24.456,54.743 R4?.1
"Net48 Pin Conn_H1": "48 Pin Conn.H1" ADS1256.11 R5?.1 | length 33.7
  Top Layer w0.254: 18.796,39.523 21.303,39.523 23.955,42.175 ADS1256.11 26.864,42.138 27.814,42.138 28.615,41.336 28.615,39.764 28.107,39.256 28.107,35.699 23.435,31.027 23.435,22.423 24.147,21.711 R5?.1
"Net48 Pin Conn_J1": "48 Pin Conn.J1" ADS1256.12 R6?.1 | length 42
  Top Layer w0.254: R6?.1 11.544,18.851 17.011,24.317 17.461,24.317 22.927,29.784 22.927,34.794 28.107,39.974 28.107,41.126 27.746,41.487 26.864,41.487 ADS1256.12 24.88,41.525 20.378,37.023 18.796,37.023
"Net48 Pin Conn_K1": "48 Pin Conn.K1" ADS1256.13 R7?.1 | length 32.6
  Top Layer w0.254: R7?.1 5.074,18.851 5.372,19.149 5.372,21.142 10.372,26.142 11.585,26.142 18.743,33.299 18.743,33.674 25.906,40.837 26.789,40.837 ADS1256.13
"NetADC Clock Generator_8": "ADC Clock Generator.8" ADS1256.19
NetC0?_2: C0?.2 R0?.2 | length 3
  Top Layer w0.254: C0?.2 3.194,68.127 R0?.2
NetC1?_2: C1?.2 R1?.2 | length 2.9
  Top Layer w0.254: C1?.2 8.727,68.072 R1?.2
NetC2?_2: C2?.2 R2?.2 | length 3.1
  Top Layer w0.254: C2?.2 14.315,68.072 R2?.2
NetC3?_2: C3?.2 R3?.2 | length 2.7
  Top Layer w0.254: C3?.2 27.106,62.465 R3?.2
NetC4?_2: C4?.2 R4?.2 | length 2.7
  Top Layer w0.254: C4?.2 27.106,57.258 R4?.2
NetC5?_2: C5?.2 R5?.2 | length 2.7
  Top Layer w0.254: C5?.2 26.797,23.495 R5?.2
NetC6?_2: C6?.2 R6?.2 | length 2.9
  Top Layer w0.254: R6?.2 12.808,16.201 C6?.2
NetC7?_2: C7?.2 R7?.2 | length 2.9
  Top Layer w0.254: R7?.2 7.22,16.201 C7?.2
NetDS1_1: DS1.1 R1.2
NetDS2_1: DS2.1 R2.2
NetDS3_1: DS3.1 R3.2
NetDS4_1: DS4.1 R4.2
NetI/O_1: I/O.1
"NetRTC power batt_2": "RTC Power Batt.2"
"NetTeensy 4.1_46": 
"NetTeensy 4.1_50": 
"NetTeensy 4.1_51": 
pads on no net: "48 Pin Conn.J3" "48 Pin Conn.J4" "48 Pin Conn.K3" "48 Pin Conn.K4" "48 Pin Conn.MOUNT1" "48 Pin Conn.MOUNT2" "ADC Clock Generator.1" "Analog VREF Generator.1" "Analog VREF Generator.3" "Analog VREF Generator.5" "Analog VREF Generator.7" "Analog VREF Generator.8" "Btn 4.1" "Teensy 4.1.3.3V_3" "Teensy 4.1.5V" "Teensy 4.1.D+" "Teensy 4.1.D-" "Teensy 4.1.GND4" "Teensy 4.1.GND5" "Teensy 4.1.LED" "Teensy 4.1.ON/OFF" "Teensy 4.1.PROGRAM" "Teensy 4.1.R+" "Teensy 4.1.R-" "Teensy 4.1.T+" "Teensy 4.1.T-" "Teensy 4.1.USB_GND1" "Teensy 4.1.USB_GND2" "Teensy 4.1.VBAT" "Teensy 4.1.VUSB" ADS1256.18 ADS1256.25 ADS1256.26 ADS1256.27 ADS1256.28 Display.S1 Display.S2 Display.S3 Display.S4 R4.1 XBee.4 XBee.5 XBee.6 XBee.7 XBee.8 XBee.9 XBee.11 XBee.12 XBee.13 XBee.14 XBee.15 XBee.16 XBee.17 XBee.18 XBee.19 XBee.20

## Other copper
Top Layer:
  region: 110.738,36.118 110.738,36.056 110.676,36.056 110.676,36.118
  region: 114.347,31.576 114.409,31.576 114.409,31.514 114.347,31.514
  region: 113.165,27.407 113.227,27.407 113.227,27.283 113.102,27.283 113.102,27.345 113.165,27.345
  region: 112.854,28.216 112.854,28.278 112.916,28.278 112.916,28.216
  region: 112.791,28.403 112.729,28.403 112.729,28.465 112.791,28.465
  region: 106.071,33.878 106.133,33.878 106.133,33.754 106.071,33.754 106.071,33.816
  region: 112.791,27.905 112.854,27.905 112.854,27.843 112.791,27.843
  region: 112.854,28.278 112.791,28.278 112.791,28.34 112.854,28.34
  region: 107.129,34.501 107.129,34.687 107.316,34.687 107.316,34.501 107.253,34.501 107.253,34.438 107.191,34.438 107.191,34.501
  region: 104.64,33.132 104.64,32.945 104.578,32.945 104.578,33.132
  region: 113.227,27.718 113.165,27.718 113.165,27.78 113.227,27.78
  region: 107.378,33.505 107.378,33.567 107.44,33.567 107.44,33.505
  region: 113.04,28.154 112.978,28.154 112.978,28.216 113.04,28.216
  region: 114.16,37.736 114.16,37.798 114.098,37.798 114.098,37.861 114.222,37.861 114.222,37.798 114.285,37.798 114.285,37.736 114.347,37.736 114.347,37.55 114.409,37.55 114.409,37.425 114.347,37.425 114.347,37.301 114.285,37.301 114.285,37.238 114.16,37.238 114.16,37.301 114.222,37.301 114.222,37.363 114.285,37.363 114.285,37.612 114.222,37.612 114.222,37.736
  region: 115.591,33.443 115.591,33.567 115.654,33.567 115.654,33.443
  region: 112.854,27.283 112.854,27.22 112.729,27.22 112.729,27.283 112.791,27.283
  region: 104.64,33.754 104.702,33.754 104.702,33.816 104.951,33.816 104.951,33.754 105.013,33.754 105.013,33.567 104.951,33.567 104.951,33.443 104.889,33.443 104.889,33.256 104.827,33.256 104.827,33.194 104.64,33.194 104.64,33.692
  region: 113.102,30.332 113.165,30.332 113.165,30.269 113.102,30.269
  region: 109.618,33.692 109.742,33.692 109.742,33.629 109.68,33.629 109.68,33.567 109.618,33.567 109.618,33.629
  region: 113.102,27.532 113.102,27.594 113.227,27.594 113.227,27.469 113.165,27.469 113.165,27.532
  region: 104.889,34.127 104.951,34.127 104.951,34.189 105.013,34.189 105.013,34.127 105.076,34.127 105.076,34.003 105.013,34.003 105.013,33.941 104.951,33.941 104.951,34.003 104.889,34.003 104.889,34.065
  region: 113.165,27.158 113.227,27.158 113.227,27.096 113.102,27.096 113.102,27.158
  region: 105.885,32.447 106.009,32.447 106.009,32.385 105.885,32.385
  region: 113.227,26.972 113.227,26.909 112.978,26.909 112.978,26.972 113.165,26.972
  region: 105.822,32.509 105.885,32.509 105.885,32.447 105.822,32.447 105.822,32.323 105.698,32.323 105.698,32.261 105.636,32.261 105.636,32.198 105.449,32.198 105.449,32.136 105.387,32.136 105.387,32.074 104.827,32.074 104.827,32.136 104.765,32.136 104.765,32.261 105.387,32.261 105.387,32.323 105.573,32.323 105.573,32.385 105.636,32.385 105.636,32.572 105.822,32.572
  region: 112.605,37.861 112.605,37.923 112.667,37.923 112.667,38.047 112.791,38.047 112.791,37.985 112.729,37.985 112.729,37.861 112.667,37.861 112.667,37.736 112.729,37.736 112.729,37.55 112.667,37.55 112.667,37.674 112.605,37.674 112.605,37.798
  region: 105.822,33.941 105.822,34.003 105.885,34.003 105.885,34.127 106.009,34.127 106.009,33.443 105.885,33.443 105.885,33.505 105.822,33.505 105.822,33.629 105.76,33.629 105.76,33.816 105.698,33.816 105.698,33.878 105.76,33.878 105.76,33.941
  region: 112.729,27.096 112.854,27.096 112.854,27.034 112.729,27.034
  region: 106.507,38.047 106.631,38.047 106.631,37.985 106.507,37.985
  region: 104.889,32.758 104.889,32.634 104.765,32.634 104.765,32.696 104.702,32.696 104.702,32.758 104.765,32.758 104.765,32.821 104.827,32.821 104.827,32.758
  region: 108.125,34.749 107.938,34.749 107.938,34.812 107.876,34.812 107.876,34.936 107.938,34.936 107.938,34.874 108.062,34.874 108.062,34.812 108.187,34.812 108.187,34.749
  region: 108.062,35.185 108,35.185 108,35.309 108.062,35.309 108.062,35.247
  region: 108.125,35.372 108.125,35.309 108.062,35.309 108.062,35.372
  region: 112.791,27.532 112.854,27.532 112.854,27.469 112.978,27.469 112.978,27.407 112.729,27.407 112.729,27.469 112.791,27.469
  region: 105.822,35.123 105.822,35.496 105.947,35.496 105.947,35.309 106.009,35.309 106.009,35.247 106.071,35.247 106.071,34.563 106.009,34.563 106.009,34.438 106.133,34.438 106.133,34.501 106.196,34.501 106.196,34.998 106.382,34.998 106.382,34.936 106.507,34.936 106.507,34.874 106.569,34.874 106.569,34.687 106.507,34.687 106.507,34.563 106.445,34.563 106.445,34.501 106.382,34.501 106.382,34.438 106.32,34.438 106.32,34.376 106.258,34.376 106.258,34.314 106.133,34.314 106.133,34.252 106.071,34.252 106.071,34.189 105.822,34.189 105.822,34.252 105.76,34.252 105.76,34.501 105.698,34.501 105.698,34.563 105.76,34.563 105.76,34.812 105.822,34.812 105.822,35.061
  region: 114.098,37.861 114.036,37.861 114.036,37.923 114.098,37.923
  region: 109.867,36.118 109.805,36.118 109.805,36.181 109.742,36.181 109.742,36.243 109.68,36.243 109.68,36.305 109.618,36.305 109.618,36.367 109.68,36.367 109.68,36.43 109.742,36.43 109.742,36.554 109.68,36.554 109.68,36.616 109.867,36.616 109.867,36.554 110.053,36.554 110.053,36.616 110.116,36.616 110.116,36.678 110.178,36.678 110.178,36.803 110.24,36.803 110.24,36.865 110.302,36.865 110.302,36.927 110.365,36.927 110.365,36.99 110.489,36.99 110.489,36.927 110.551,36.927 110.551,36.865 110.489,36.865 110.489,36.741 110.427,36.741 110.427,36.678 110.365,36.678 110.365,36.492 110.302,36.492 110.302,36.43 110.24,36.43 110.24,36.305 110.178,36.305 110.178,36.181 110.116,36.181 110.116,36.056 109.991,36.056 109.991,35.994 109.867,35.994 109.867,36.056
  region: 111.236,37.052 111.236,37.176 111.298,37.176 111.298,37.238 111.36,37.238 111.36,37.363 111.422,37.363 111.422,37.425 111.485,37.425 111.485,37.363 111.547,37.363 111.547,37.238 111.485,37.238 111.485,37.114 111.422,37.114 111.422,37.052 111.36,37.052 111.36,36.865 111.298,36.865 111.298,36.803 111.236,36.803 111.236,36.678 111.174,36.678 111.174,36.492 111.049,36.492 111.049,36.43 110.987,36.43 110.987,36.492 110.925,36.492 110.925,36.554 110.987,36.554 110.987,36.678 111.049,36.678 111.049,36.803 111.111,36.803 111.111,36.927 111.174,36.927 111.174,36.99 111.236,36.99
  region: 106.693,34.314 106.756,34.314 106.756,34.252 106.88,34.252 106.88,34.189 107.005,34.189 107.005,34.127 107.129,34.127 107.129,34.189 107.378,34.189 107.378,34.127 107.253,34.127 107.253,34.065 107.067,34.065 107.067,34.003 107.005,34.003 107.005,33.941 106.942,33.941 106.942,33.754 107.067,33.754 107.067,33.692 107.129,33.692 107.129,33.629 107.253,33.629 107.253,33.443 107.316,33.443 107.316,33.318 107.253,33.318 107.253,33.256 107.129,33.256 107.129,33.567 107.067,33.567 107.067,33.069 106.942,33.069 106.942,32.945 106.88,32.945 106.88,32.883 106.818,32.883 106.818,32.821 106.756,32.821 106.756,32.758 106.631,32.758 106.631,32.696 106.569,32.696 106.569,32.634 106.445,32.634 106.445,32.572 106.258,32.572 106.258,32.509 106.196,32.509 106.196,32.447 106.009,32.447 106.009,32.634 106.133,32.634 106.133,32.572 106.196,32.572 106.196,32.758 106.258,32.758 106.258,32.821 106.32,32.821 106.32,32.945 106.258,32.945 106.258,34.003 106.196,34.003 106.196,34.252 106.258,34.252 106.258,34.314 106.382,34.314 106.382,34.376 106.445,34.376 106.445,34.438 106.507,34.438 106.507,34.501 106.631,34.501 106.631,34.563 106.693,34.563 hole: 106.942,33.318 106.88,33.318 106.88,33.194 106.942,33.194 106.942,33.132 107.005,33.132 107.005,33.194 107.005,33.256 106.942,33.256
  region: 113.04,28.527 113.102,28.527 113.102,28.465 113.165,28.465 113.165,28.403 113.04,28.403 113.04,28.34 112.916,28.34 112.916,28.403 112.854,28.403 112.854,28.527 112.916,28.527 112.916,28.589 113.04,28.589
  region: 110.676,35.87 110.614,35.87 110.614,35.745 110.551,35.745 110.551,35.621 110.489,35.621 110.489,35.558 110.427,35.558 110.427,35.496 110.365,35.496 110.365,35.309 110.302,35.309 110.302,35.123 110.365,35.123 110.365,34.998 110.302,34.998 110.302,34.874 110.24,34.874 110.24,34.625 110.302,34.625 110.302,34.563 110.24,34.563 110.24,34.501 110.178,34.501 110.178,34.438 110.116,34.438 110.116,34.376 110.053,34.376 110.053,34.314 109.991,34.314 109.991,34.189 109.929,34.189 109.929,34.127 109.742,34.127 109.742,34.189 109.805,34.189 109.805,34.252 109.867,34.252 109.867,34.314 109.929,34.314 109.929,34.501 110.053,34.501 110.053,34.625 110.116,34.625 110.116,34.687 109.991,34.687 109.991,34.625 109.929,34.625 109.929,34.563 109.742,34.563 109.742,34.687 109.68,34.687 109.68,34.563 109.556,34.563 109.556,34.625 109.493,34.625 109.493,34.563 109.307,34.563 109.307,34.501 109.058,34.501 109.058,34.687 109.12,34.687 109.12,34.749 109.182,34.749 109.182,34.812 109.307,34.812 109.307,34.874 109.369,34.874 109.369,34.936 109.431,34.936 109.431,34.998 109.493,34.998 109.493,35.123 109.556,35.123 109.556,35.185 109.618,35.185 109.618,35.372 109.68,35.372 109.68,35.621 109.742,35.621 109.742,35.745 109.867,35.745 109.867,35.621 109.929,35.621 109.929,35.434 109.867,35.434 109.867,34.936 109.929,34.936 109.929,35.123 109.991,35.123 109.991,35.372 110.053,35.372 110.053,35.558 110.302,35.558 110.302,35.621 110.365,35.621 110.365,35.745 110.427,35.745 110.427,35.807 110.489,35.807 110.489,35.932 110.551,35.932 110.551,35.994 110.614,35.994 110.614,36.056 110.676,36.056 hole: 109.929,34.812 109.867,34.812 109.867,34.749 109.929,34.749
  region: 112.791,33.629 112.791,33.567 112.729,33.567 112.729,33.443 112.542,33.443 112.542,33.505 112.48,33.505 112.48,33.567 112.418,33.567 112.418,33.629 112.356,33.629 112.356,33.754 112.294,33.754 112.294,33.878 112.356,33.878 112.356,34.003 112.418,34.003 112.418,33.941 112.48,33.941 112.48,34.003 112.542,34.003 112.542,33.941 112.791,33.941 112.791,33.878 112.854,33.878 112.854,33.754 112.791,33.754 112.791,33.692
  region: 107.067,35.558 107.005,35.558 107.005,35.932 107.067,35.932 107.067,36.181 107.129,36.181 107.129,35.932 107.191,35.932 107.191,35.621 107.253,35.621 107.253,35.434 107.316,35.434 107.316,35.309 107.378,35.309 107.378,35.185 107.44,35.185 107.44,34.936 107.378,34.936 107.378,34.812 107.191,34.812 107.191,34.874 107.129,34.874 107.129,35.061 107.191,35.061 107.191,35.434 107.129,35.434 107.129,35.496 107.067,35.496
  region: 112.791,27.718 112.854,27.718 112.854,27.656 112.729,27.656 112.729,27.718
  region: 107.374,51.628 107.287,51.628 107.287,51.687 107.374,51.687 107.374,51.658

## Silkscreen, mask and mechanical layers (free items; w line width, h text height)
Top Overlay:
  drawing of 15 lines, arcs and shapes, not listed
  text "2025 - 2026" at 114.3,73.914 h1.3 r270
  text "Designed by Kyle Jiang and Andrew Rissler" at 116.713,73.914 h1.3 r270
  text "tonight we steal the moon" at 104.089,29.201 h0.51
Mechanical 1:
  the board outline again, w0.254

## Text inside footprints (layer, text, board x,y; h text height)
"48 Pin Conn": Top Overlay "REFDES" at 12.161,44.395 h1.27 r270; Top Overlay "RefDes" at 12.161,44.078 h1.27 r270; Mechanical 13 "RefDes2" at 12.161,44.395 h1.27 r270